# EAGLE board LeadAcid_Battery_Charger_v001 (EAGLE 7.1.0)
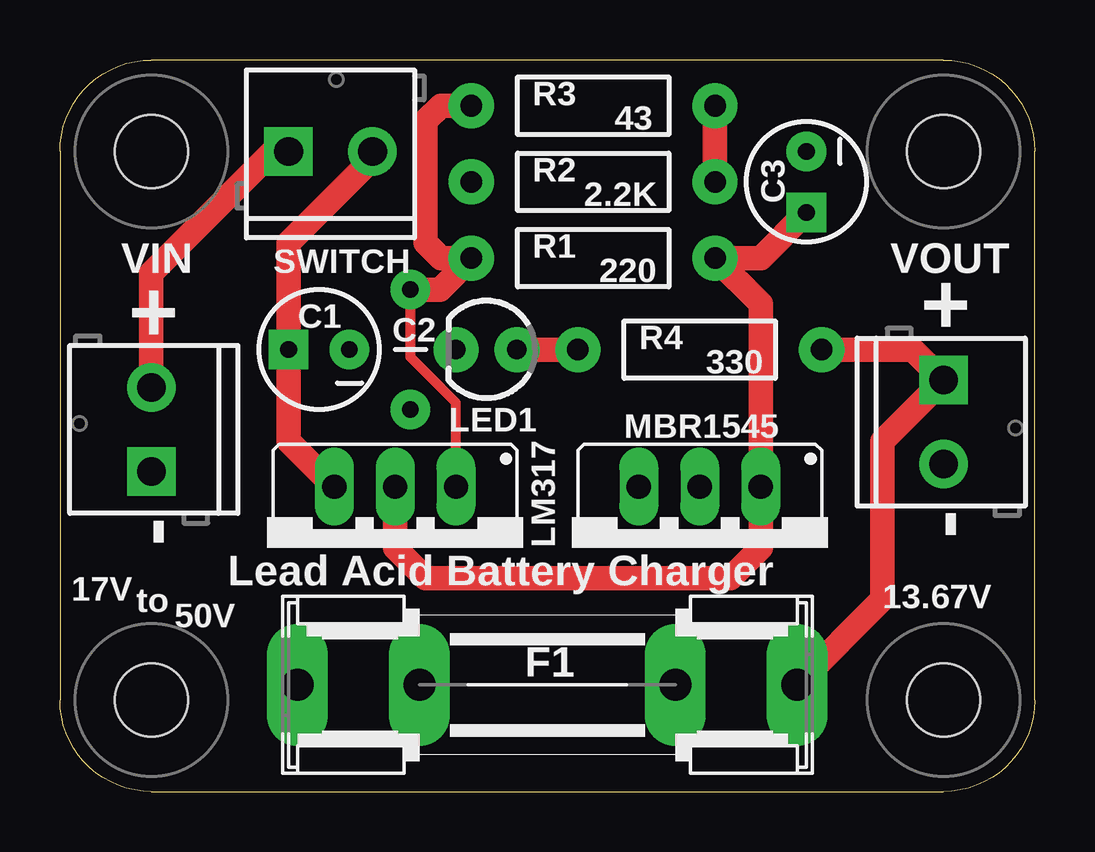
[diagram p0: board, top side]
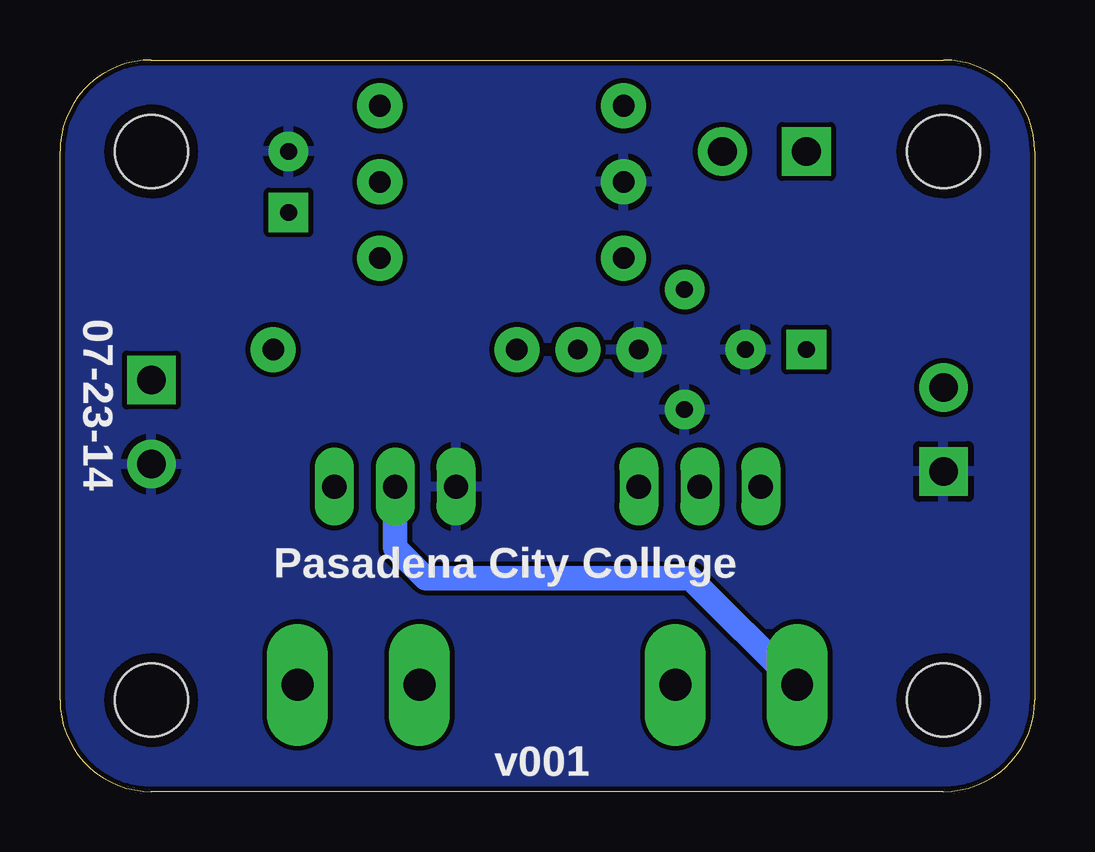
[diagram p1: board, bottom side, seen from below]

Size 40.64 x 30.48 mm. Coordinates in mm from the lower left corner, seen from the top.
Outline: 3.81,0 36.83,0 arc90 40.64,3.81 40.64,26.67 arc90 36.83,30.48 3.81,30.48 arc90 0,26.67 0,3.81 arc90 3.81,0
Copper layers (1*16): Top 0.035mm / dielectric 1.5mm / Bottom 0.035mm
Design rules "ai_2layer": minimum track width 7mil, minimum drill 15mil, track to track 8mil, track to pad 8mil, pad to pad 8mil, via to via 8mil, smd to smd 8mil, copper to edge 8mil, drill to drill 8mil, minimum pad ring 12mil, minimum via ring 10mil, stop-mask expansion 4mil, vias tented up to drill 20mil, thermal gap 10mil
Net classes: 0 default: width 0.406 mm, clearance 0.203 mm; 1 pwr: width 1.016 mm, clearance 0.203 mm

## Footprints (pad centres in the part's own frame; a part is rotated, then mirrored left to right if it is on the bottom)
CPOL-RADIAL-10UF-25V = drill 0.7 pad 1.651 square: 1 1.27,0 | drill 0.7 pad 1.651: 2 -1.27,0
CAP-PTH-5MM = drill 0.7 pad 1.651: 1 -2.5,0; 2 2.5,0
SHK20L = drill 1.321 pad 2.54 long: 1A -10.414,0; 1B -5.334,0; 2A 10.414,0; 2B 5.334,0
LED3MM = drill 0.813 pad 1.88: A -1.27,0; K 1.27,0
317TS = drill 1.016 long: 1 -2.54,-2.54; 2 0,-2.54; 3 2.54,-2.54
TO-220 = drill 1.016 long: 1 -1.27,0; 2 1.27,0; 3 3.81,0
AXIAL-0.4 = drill 0.9 pad 1.88: P$1 -5.08,0; P$2 5.08,0
SCREWTERMINAL-3.5MM-2 = drill 1.2 pad 2.032 square: 1 0,0 | drill 1.2 pad 2.032: 2 3.5,0
STAND-OFF-TIGHT = hole 3.048: 0,0

## Placement (x,y rotation side)
C1  10uF  [CPOL-RADIAL-10UF-25V]  10.79,18.41 180 top
C2  0.1uF  [CAP-PTH-5MM]  14.61,18.41 270 top
C3  10uF  [CPOL-RADIAL-10UF-25V]  31.11,25.4 270 top
F1  [SHK20L]  20.32,4.45 0 top
LED1  [LED3MM]  17.78,18.41 180 top
LM317  [317TS]  13.97,10.16 180 top
MBR1545  MBR1545  [TO-220]  27.94,12.7 180 top
R1  220  [AXIAL-0.4]  22.23,22.23 0 top
R2  43  [AXIAL-0.4]  22.23,28.57 180 top
R3  2.2K  [AXIAL-0.4]  22.23,25.4 0 top
R4  330  [AXIAL-0.4]  26.67,18.41 0 top
SWITCH  M023.5MM  [SCREWTERMINAL-3.5MM-2]  9.53,26.67 0 top
U$1  [STAND-OFF-TIGHT]  3.81,3.81 0 top
U$3  [STAND-OFF-TIGHT]  36.83,3.81 0 top
U$4  [STAND-OFF-TIGHT]  3.81,26.67 0 top
U$5  [STAND-OFF-TIGHT]  36.83,26.67 0 top
VIN  M023.5MM  [SCREWTERMINAL-3.5MM-2]  3.81,13.34 90 top
VOUT  M023.5MM  [SCREWTERMINAL-3.5MM-2]  36.83,17.14 270 top

## Library data of the parts
C1-C3 R1-R4 = SparkFun-Passives
F1 = fuse; OC_FARNELL: unknown; OC_NEWARK: unknown
LED1 = SparkFun-LED
LM317 = v-reg
MBR1545 = Alberto
SWITCH VIN VOUT = SparkFun-Connectors
U$1 U$3-U$5 = Ai_Electromechanical

## Nets
GND [pwr]: C1.2 C2.2 C3.2 LED1.K MBR1545.3 R3.P$1 VIN.1 VOUT.2
N$1 [pwr]: F1.1A MBR1545.2
N$2 [pwr]: C3.1 LM317.2 MBR1545.1 R1.P$2
N$3 [pwr]: F1.2A R4.P$2 VOUT.1
N$4: R2.P$1 R3.P$2
N$5: C2.1 LM317.1 R1.P$1 R2.P$2
N$6: LED1.A R4.P$1
N$7 [pwr]: SWITCH.1 VIN.2
N$8 [pwr]: C1.1 LM317.3 SWITCH.2

## Tracks (layer width: path | path; a pad name or v marks a point on that pad's centre or on a via)
GND
  pour Bottom: 0,0 0,30.48 40.64,30.48 40.64,0
N$1
  Bottom 1.016: MBR1545.2 26.67,10.16 25.4,8.89 14.35,8.89 F1.1A
N$2
  Top 1.016: C3.1 29.21,22.23 R1.P$2 29.21,20.32 MBR1545.1 29.21,10.16 27.94,8.89 15.24,8.89 13.97,10.16 LM317.2
N$3
  Top 1.016: R4.P$2 35.56,18.41 VOUT.1 34.29,14.61 34.29,8 F1.2A
N$4
  Top 1.016: R2.P$1 R3.P$2
N$5
  Top 0.406: LM317.1 16.51,16.19 14.61,18.1 C2.1
  Top 1.016: C2.1 15.84,20.91 R1.P$1 15.88,22.23 15.24,22.86 15.24,27.94 15.88,28.57 R2.P$2
N$6
  Top 1.016: LED1.A R4.P$1
N$7
  Top 1.016: VIN.2 3.81,21.59 8.89,26.67 SWITCH.1
N$8
  Top 1.016: SWITCH.2 13.03,26.36 9.53,22.86 C1.1 9.53,14.61 LM317.3

## Text on the board
tPlace: + | + | - | - | Lead Acid Battery Charger | 17V | 13.67V | to | 50V
bPlace: 07-23-14 | Pasadena City College | v001